# EAGLE board MainBoard (EAGLE 9.1.3)
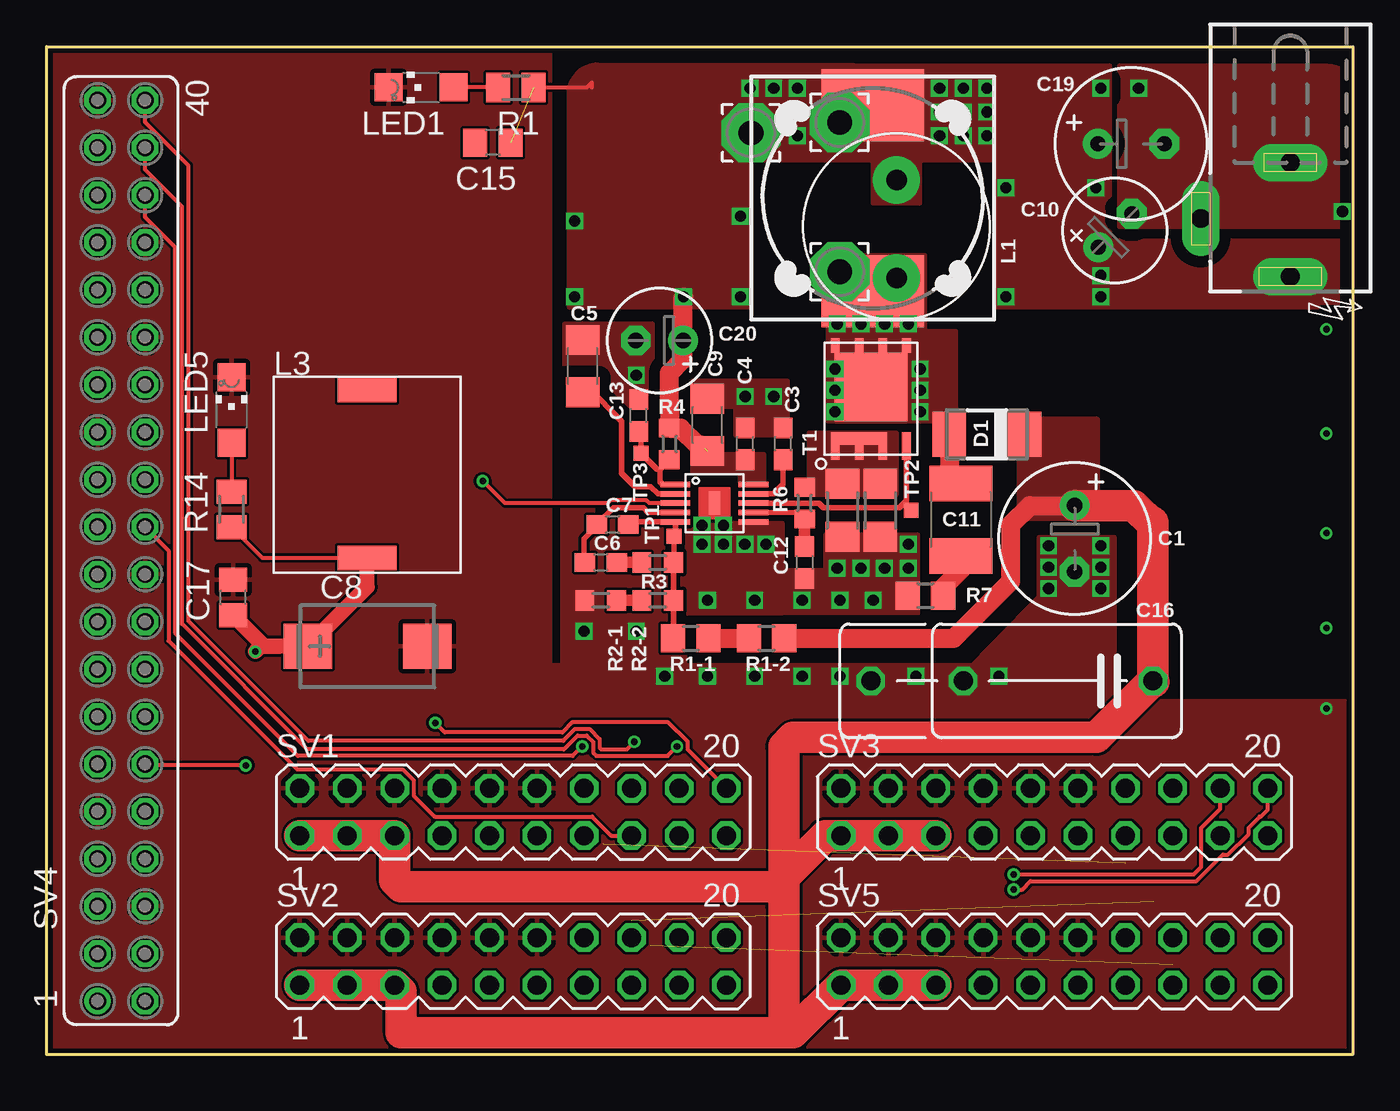
[diagram p0: board, top side]
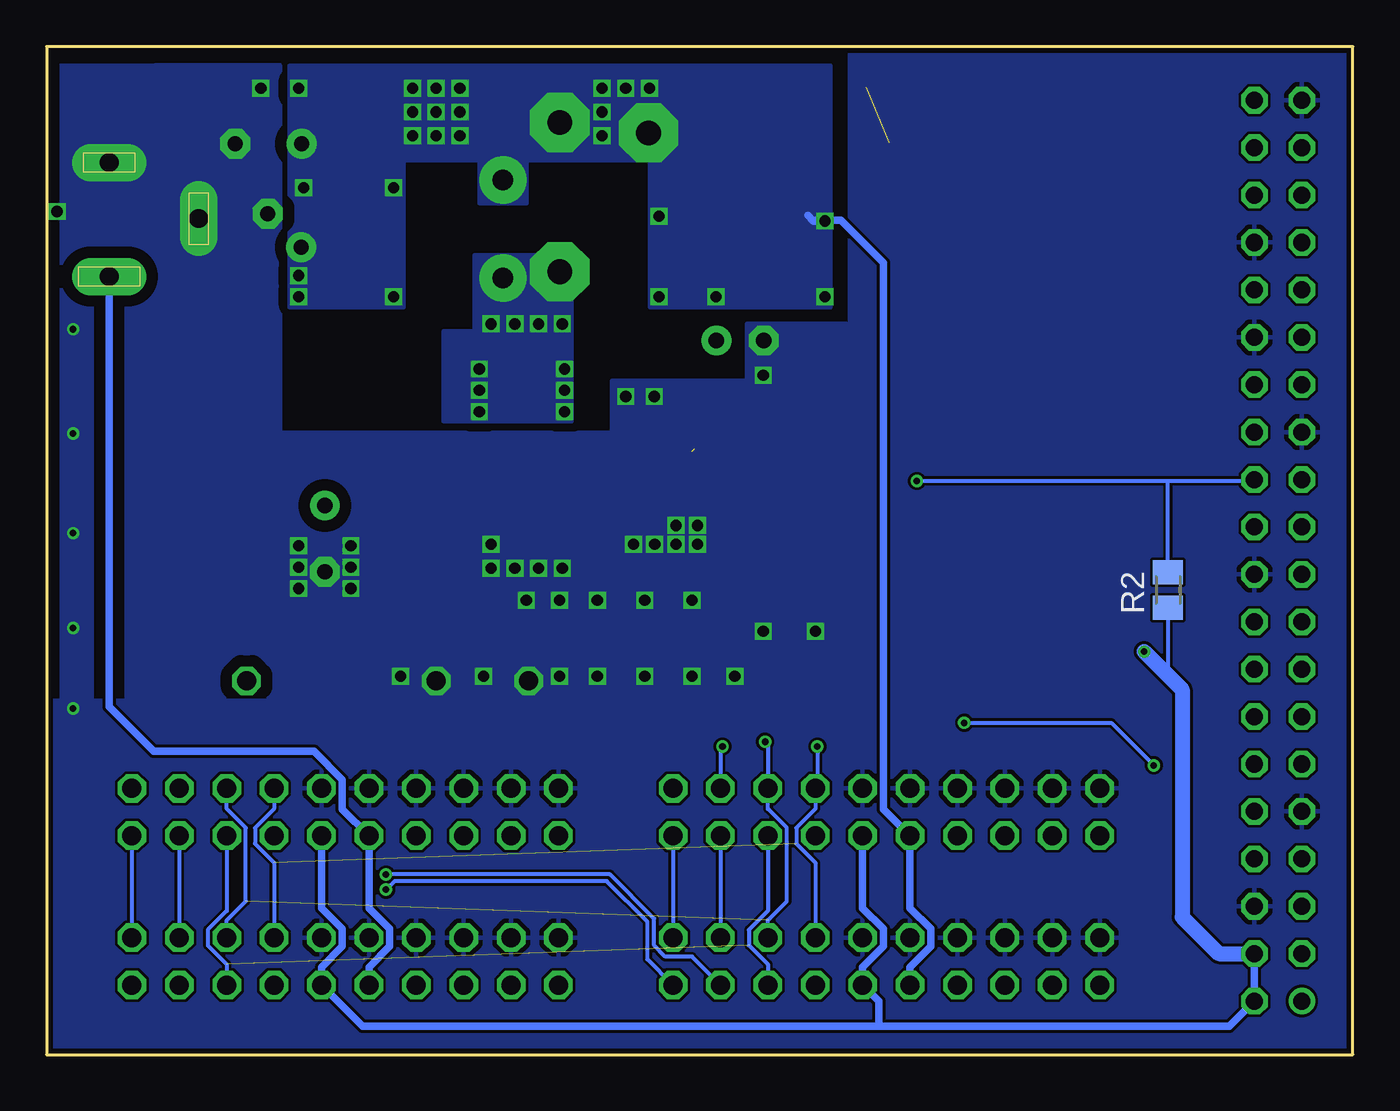
[diagram p1: board, bottom side, seen from below]

Size 70 x 54 mm. Coordinates in mm from the lower left corner, seen from the top.
Outline: 0,0 0,54 70,54 70,0 0,0
Copper layers (1*16): Top 0.035mm / dielectric 1.5mm / Bottom 0.035mm
Design rules "ITEADstudio_DRC": minimum track width 6mil, minimum drill 12mil, track to track 6mil, track to pad 6mil, pad to pad 6mil, via to via 6mil, smd to smd 0mil, copper to edge 10mil, drill to drill 10mil, minimum pad ring 10mil, minimum via ring 6mil, stop-mask expansion 2mil, vias tented up to drill 100mil, thermal gap 10mil

## Footprints (pad centres in the part's own frame; a part is rotated, then mirrored left to right if it is on the bottom)
E3,5-8 = drill 0.813 pad 1.6: + -1.778,0 | drill 0.813 pad 1.6 octagon: - 1.778,0
C0603 = smd 1.1 x 1: 1 -0.85,0; 2 0.85,0
C1206 = smd 1.6 x 1.8: 1 -1.4,0; 2 1.4,0
CT7343 = smd 2.6 x 2.4: + -3.2,0; - 3.2,0
E2,5-6 = drill 0.813 pad 1.6: + -1.27,0 | drill 0.813 pad 1.6 octagon: - 1.27,0
C1812 = smd 1.9 x 3.4: 1 -1.95,0; 2 1.95,0
C0805 = smd 1.3 x 1.5: 1 -0.95,0; 2 0.95,0
C102_152-062X184 = drill 1.016 octagon: 1 -5.08,0; 2 5.08,0; 3 10.033,0
DO-214AC = smd 1.8 x 2.4: A 2.025,0; C -2.025,0
MSOP10 = smd 0.3 x 1.6: P$1 -1,-2.1; P$2 -0.5,-2.1; P$3 0,-2.1; P$4 0.5,-2.1; P$5 1,-2.1; P$6 1,2.1; P$7 0.5,2.1; P$8 0,2.1; P$9 -0.5,2.1; P$10 -1,2.1 | smd 1.27 x 0.635: PWRPAD 0,0
DCJ0303 = drill 1 pad 2 long: 1 0,3.1; 2 4.8,0; 3 0,-3
DR125 = smd 3.85 x 5.5: 1 -4.975,0; 2 4.975,0
SRR1050A = smd 3.15 x 1.325: P$1 0,0; P$2 0,-9
CHIPLED_1206 = smd 1.5 x 1.5: A 0,-1.75; C 0,1.75
3,17/1,3 = drill 1.321 pad 3.175 octagon: 1 0,0
M0805 = smd 1.3 x 1.6: 1 -0.95,0; 2 0.95,0
R0805 = smd 1.3 x 1.5: 1 -0.95,0; 2 0.95,0
R0603 = smd 1 x 1.1: 1 -0.85,0; 2 0.85,0
R1206 = smd 1.6 x 1.803: 1 -1.422,0; 2 1.422,0
MA10-2 = drill 1.016 octagon: 1 -11.43,-1.27; 2 -11.43,1.27; 3 -8.89,-1.27; 4 -8.89,1.27; 5 -6.35,-1.27; 6 -6.35,1.27; 7 -3.81,-1.27; 8 -3.81,1.27; 9 -1.27,-1.27; 10 -1.27,1.27; 11 1.27,-1.27; 12 1.27,1.27; 13 3.81,-1.27; 14 3.81,1.27; 15 6.35,-1.27; 16 6.35,1.27; 17 8.89,-1.27; 18 8.89,1.27; 19 11.43,-1.27; 20 11.43,1.27
FE20-2 = drill 0.914: 1 -24.13,1.27 | drill 0.914 octagon: 2 -24.13,-1.27; 3 -21.59,1.27; 4 -21.59,-1.27; 5 -19.05,1.27; 6 -19.05,-1.27; 7 -16.51,1.27; 8 -16.51,-1.27; 9 -13.97,1.27; 10 -13.97,-1.27; 11 -11.43,1.27; 12 -11.43,-1.27; 13 -8.89,1.27; 14 -8.89,-1.27; 15 -6.35,1.27; 16 -6.35,-1.27; 17 -3.81,1.27; 18 -3.81,-1.27; 19 -1.27,1.27; 20 -1.27,-1.27; 21 1.27,1.27; 22 1.27,-1.27; 23 3.81,1.27; 24 3.81,-1.27; 25 6.35,1.27; 26 6.35,-1.27; 27 8.89,1.27; 28 8.89,-1.27; 29 11.43,1.27; 30 11.43,-1.27; 31 13.97,1.27; 32 13.97,-1.27; 33 16.51,1.27; 34 16.51,-1.27; 35 19.05,1.27; 36 19.05,-1.27; 37 21.59,1.27; 38 21.59,-1.27; 39 24.13,1.27; 40 24.13,-1.27
PQFN5X6 = smd 0.79 x 0.46: D1 2.22,-1.905; D2 2.22,-0.635; D3 2.22,0.635; D4 2.22,1.905 | smd 3.65 x 3.93: D5 0,0 | smd 1.45 x 0.46: G -3.16,-1.905; S1 -3.16,-0.635; S2 -3.16,0.635; S3 -3.16,1.905 | smd 0.66 x 3: S4 -2.765,0.635
TP08SQ = smd 0.8 x 0.8: TP 0,0
DSZ-10-R5 = drill 1.1 pad 2.54: P1 -2.75,0; P2 2.5,0

## Placement (x,y rotation side)
C1  4.7uF 250V  [E3,5-8]  55.09,27.64 270 top
C3  1uF  [C0603]  39.47,32.72 90 top
C4  100nF  [C0603]  37.44,32.72 90 top
C5  2.2uF  [C1206]  28.73,36.89 90 top
C6  150nF  [C0603]  29.69,26.37 0 top
C7  100pF  [C0603]  30.33,28.4 0 top
C8  100µF  [CT7343]  17.19,21.88 0 top
C9  10uF  [C1206]  35.41,33.74 90 top
C10  100uF  [E2,5-6]  57.25,44.15 45 top
C11  100pF 250V  [C1812]  49,28.66 270 top
C12  330pF  [C0603]  40.61,26.37 270 top
C13  470pF  [C0603]  31.72,34.24 90 top
C15  100nF  [C0805]  23.91,48.86 180 top
C16  100nF 250V X2  [C102_152-062X184]  54.2,20.02 180 top
C17  100nF  [C0805]  10,24.5 90 top
C19  100uF  [E3,5-8]  58.12,48.8 0 top
C20  100uF  [E2,5-6]  32.84,38.26 180 top
D1  ES2G  [DO-214AC]  50.39,33.23 180 top
IC1  TPS40210DGQ  [MSOP10]  35.79,29.55 270 top
J1  [DCJ0303]  66.65,44.79 180 top
L1  47uH  [DR125]  44.27,45.88 90 top
L3  22µH  [SRR1050A]  17.18,35.61 0 top
LED1  [CHIPLED_1206]  20.07,51.82 90 top
LED5  [CHIPLED_1206]  9.91,34.54 0 top
LP1  [3,17/1,3]  42.49,49.94 0 top
LP2  [3,17/1,3]  42.49,41.94 0 top
LP3  [3,17/1,3]  37.74,49.38 0 top
R1  5.6k  [M0805]  25.15,51.82 180 top
R1-1  150k  [R0805]  34.52,22.31 0 top
R1-2  150k  [R0805]  38.58,22.31 0 top
R2  5.6k  [M0805]  9.91,24.89 90 bottom
R2-1  1k  [R0603]  29.69,24.34 0 top
R2-2  150R  [R0603]  32.74,24.34 0 top
R3  240k  [R0603]  32.74,26.37 180 top
R4  620k  [R0603]  33.38,32.72 90 top
R5-1  0R100  [R1206]  42.65,29.16 90 top
R5-2  0R100  [R1206]  44.68,29.16 90 top
R6  1k  [R0603]  40.61,29.55 90 top
R7  3R3  [R0805]  47.09,24.59 0 top
R14  1.5k  [M0805]  9.91,29.21 90 top
SV1  [MA10-2]  25,13 0 top
SV2  [MA10-2]  25,5 0 top
SV3  [MA10-2]  54,13 0 top
SV4  [FE20-2]  4,27 90 top
SV5  [MA10-2]  54,5 0 top
T1  IRFH5025PBF  [PQFN5X6]  44.17,35.77 90 top
TP1  TPTP08SQ  [TP08SQ]  33.63,27.77 0 top
TP2  TPTP08SQ  [TP08SQ]  46.33,29.16 0 top
TP3  TPTP08SQ  [TP08SQ]  31.85,32.21 0 top
U$2  FERYSTER-DSZ-10-R5  [DSZ-10-R5]  45.54,44.35 90 top
U$5  [DANGER-SIGN-1X]  70.59,39.2 90 top

## Library data of the parts
C1 C3-C7 C9-C13 C19 C20 R1-1 R1-2 R2-1 R2-2 R3 R4 R5-1 R5-2 R6 R7 = rcl
C8 = rcl; MOUSER: 581-NOSD107M006; SPICEPREFIX: C
C15 C17 = rcl; MOUSER: 710-885012207072; SPICEPREFIX: C
C16 U$2 U$5 = jwr
D1 = diode
IC1 = TI-power
J1 = con-jack; OC_FARNELL: unknown; OC_NEWARK: unknown
L1 = inductors
L3 = lichtenstein_onion; MOUSER: 652-SRR1050A-220Y
LED1 LED5 = led; MOUSER: 604-APTR3216SGC
LP1-LP3 = wirepad
R1 R2 = rcl; MOUSER: 652-CR0805FX-5601ELF; SPICEPREFIX: R
R14 = rcl; MOUSER: 652-CR0805FX-1501ELF; SPICEPREFIX: R
SV1-SV3 SV5 = con-lstb; OC_FARNELL: unknown; OC_NEWARK: unknown
SV4 = con-lsta; OC_FARNELL: unknown; OC_NEWARK: unknown
T1 = IRFH5025
TP1-TP3 = testpad

## Nets
!HV_EN: IC1.P$3 R2.2 SV4.24
!K_BLANK: SV1.14 SV2.14 SV3.14 SV4.36 SV5.14
!K_LATCH: SV1.15 SV2.15 SV3.15 SV4.22 SV5.15
+5V: C8.+ C17.1 L3.P$2 R2.1 R14.1 SV1.11 SV2.11 SV3.11 SV4.2 SV4.4 SV5.11
+12V: C4.1 C9.1 C10.+ C15.1 C19.+ C20.+ IC1.P$10 J1.1 L1.2 LP1.1 LP3.1 R1.1 R4.2 SV1.9 SV2.9 SV3.9 SV5.9 U$2.P2
COMP: C6.1 C7.1 IC1.P$4
D: R5-1.2 R5-2.2 R6.2 T1.S1 T1.S2 T1.S3 T1.S4
FB: C7.2 IC1.P$5 R1-1.1 R2-2.2 R3.1 TP1.TP
GDRV: IC1.P$8 T1.G TP2.TP
GND: C1.- C3.2 C4.2 C5.2 C8.- C9.2 C10.- C12.2 C13.2 C16.2 C16.3 C17.2 C19.- C20.- IC1.P$6 IC1.PWRPAD J1.2 J1.3 LED1.C LED5.C R2-1.1 R5-1.1 R5-2.1 R7.1 SV1.2 SV1.4 SV1.6 SV1.8 SV1.10 SV1.12 SV2.2 SV2.4 SV2.6 SV2.8 SV2.10 SV2.12 SV3.2 SV3.4 SV3.6 SV3.8 SV3.10 SV3.12 SV4.6 SV4.9 SV4.20 SV4.25 SV4.30 SV4.34 SV4.39 SV5.2 SV5.4 SV5.6 SV5.8 SV5.10 SV5.12
HV: C1.+ C16.1 D1.C R1-2.2 SV1.1 SV1.3 SV1.5 SV2.1 SV2.3 SV2.5 SV3.1 SV3.3 SV3.5 SV5.1 SV5.3 SV5.5
I2C_SCL: SV4.5
I2C_SDA: SV4.3
K_CLK: SV1.16 SV2.16 SV3.16 SV4.40 SV5.16
K_DIN: SV1.18 SV4.38
K_DOUT1: SV1.17 SV2.18
K_DOUT2: SV2.17 SV3.18
K_DOUT3: SV3.17 SV5.18
K_DOUT4: SV5.17
LED_DIN: SV1.20 SV4.12
LED_DOUT1: SV1.19 SV2.20
LED_DOUT2: SV2.19 SV3.20
LED_DOUT3: SV3.19 SV5.20
LED_DOUT4: SV5.19
N$1: LED5.A R14.2
N$2: LED1.A R1.2
N$4: R1-1.2 R1-2.1
N$7: C13.1 IC1.P$1 R4.1 TP3.TP
N$8: C3.1 IC1.P$9
N$9: C6.2 R3.2
N$12: R2-1.2 R2-2.1
N$13: C5.1 IC1.P$2
N$15: C11.2 R7.2
PULSE: C11.1 D1.A L1.1 LP2.1 T1.D1 T1.D2 T1.D3 T1.D4 T1.D5 U$2.P1
SNS: C12.1 IC1.P$7 R6.1

## Tracks (layer width: path | path; a pad name or v marks a point on that pad's centre or on a via)
!HV_EN  (via drill 0.35)
  Top 0.203: v23.37,30.73 24.56,29.55 30.05,29.55 30.21,29.7 32.15,29.7 32.3,29.55 IC1.P$3
  Bottom 0.203: v23.37,30.73 9.91,30.73 | 9.91,30.73 5.35,30.73 SV4.24 | R2.2 9.91,30.73
!K_BLANK  (via drill 0.35)  (1 unrouted)
  Top 0.203: v28.7,16.51 28.19,16 13.46,16 6.9,22.57 | SV4.36 5.27,44.88 6.9,43.25 6.9,22.86 | 6.9,22.57 6.9,22.86 | 6.9,22.57 6.9,22.86
  Bottom 0.203: SV3.14 57.81,13.17 58.83,12.15 58.83,11.31 57.81,10.29 SV5.14 | SV1.14 28.81,13.97 | 28.81,13.97 28.81,13.17 29.83,12.15 29.83,11.31 28.81,10.29 SV2.14 | v28.7,16.51 28.7,14.08 28.81,13.97
!K_LATCH  (1 unrouted)
  Top 0.203: SV1.15 30.25,11.73 29.23,12.75 20.79,12.75 19.67,13.87 19.67,14.69 19.07,15.29 13.43,15.29 6.54,22.17 6.54,27 SV4.22
  Bottom 0.203: SV3.15 60.35,7.71 61.37,6.69 61.37,5.85 60.35,4.83 SV5.15 | SV1.15 31.35,7.71 32.37,6.69 32.37,5.85 31.35,4.83 SV2.15
+5V  (via drill 0.35)
  Top 0.203: R14.1 11.56,26.61 L3.P$2
  Top 0.813: L3.P$2 17.18,25.06 C8.+ 12.45,21.88 | 12.45,21.88 11.46,21.88 v11.18,21.59 | C17.1 11.67,21.88 12.45,21.88
  Bottom 0.203: R2.1 9.91,20.83 10.16,20.57
  Bottom 0.406: 25.15,1.52 6.62,1.52 SV4.2 SV4.4 | 25.15,1.52 25.4,1.52 25.4,2.86 SV2.11 26.27,4.69 25.15,5.81 25.15,6.73 26.27,7.85 SV1.11 | 25.15,1.52 53.06,1.52 SV5.11 55.27,4.69 54.15,5.81 54.15,6.73 55.27,7.85 SV3.11
  Bottom 0.813: v11.18,21.59 10.16,20.57 9.14,19.56 9.14,7.37 7.19,5.41 SV4.4
+12V  (via drill 0.6)  (2 unrouted)
  Top 0.203: R1.1 28.96,51.82 29.21,52.07 29.21,51.82
  Top 1.016: 35.28,32.59 35.28,32.46 35.07,32.67 34.87,32.67 33.97,33.57 R4.2 33.38,34.5 33.38,36.28 33.38,36.51 34.11,37.24 C20.+ 34.11,40.57 v34.14,40.59
  Bottom 0.406: SV2.9 23.73,4.69 22.61,5.81 22.61,6.73 23.73,7.85 SV1.9 25.15,13.15 25.15,42.42 27.43,44.7 28.96,44.7 29.21,44.96 28.91,44.66 v28.3,44.66 | SV5.9 52.73,4.69 51.61,5.81 51.61,6.73 52.73,7.85 SV3.9 54.15,13.15 54.15,14.73 55.67,16.26 64.26,16.26 66.65,18.64 J1.1
  other vias: 50.39,50.5 50.39,51.77 38.96,51.77 40.23,50.5 40.23,51.77 40.23,49.23 56.49,41.74 56.49,40.59 47.85,51.77 47.85,50.5 47.85,49.23 37.69,51.77 49.12,49.23 50.39,49.23 49.12,50.5 49.12,51.77 28.3,40.59 37.19,40.59 37.19,44.91 51.41,40.59 51.41,46.44 56.49,51.77 56.24,46.44
  pour Top (isolate 0.61, no thermals): 51.38,40.04 68.15,40.04 68.15,43.59 51.38,43.59
  pour Top (isolate 0.61, no thermals): 62.31,43.59 62.31,40.29 70.18,40.29 70.18,40.29 70.18,43.59
  pour Bottom (no thermals): 44.27,51.21 44.27,45.62 46.81,45.62 46.81,51.21
  pour Top (no thermals): 44.27,51.21 44.27,45.62 46.81,45.62 46.81,51.21
  pour Top (isolate 0.61, no thermals): 28,40.04 28,51.5 arc-90 29.54,53.04 56.97,52.99 56.97,40.04 50.88,40.04 50.88,47.91 37.67,47.91 37.67,40.04
  pour Bottom (isolate 0.61, no thermals): 28,52.99 56.97,52.99 56.97,40.04 50.88,40.04 50.88,47.91 37.67,47.91 37.67,40.04 28,40.04
  pour Top (no thermals): 38.43,30.64 38.43,32.16 34.62,32.16 34.62,31.15 37.16,31.15 37.16,30.64
  pour Top (no thermals): 42.75,51.21 45.54,51.21 45.54,48.67 42.75,48.67
COMP
  Top 0.254: 28.93,26.37 C6.1
  Top 0.305: IC1.P$4 32.23,29.04 31.98,29.29 30.38,29.29 C7.1 29.49,28.3 28.8,27.64 28.8,26.5 28.93,26.37
D
  pour Top (no thermals): 40.84,30 40.84,33.3 45.54,33.3 45.54,30
FB
  Top 0.305: R1-1.1 33.6,22.33 R2-2.2 R3.1 33.63,26.4 TP1.TP 33.71,27.82 IC1.P$5 31.32,28.55 C7.2
GDRV
  Top 0.305: IC1.P$8 41.38,29.55 41.63,29.29 45.69,29.29 45.91,29.51 | 45.91,29.51 46.08,29.67 46.08,30.43 T1.G | TP2.TP 46.25,29.16 45.91,29.51
GND  (via drill 0.35, 0.6)
  other vias: 42.37,26.07 43.64,26.07 46.18,26.07 42.52,24.34 37.44,35.26 38.96,35.26 44.3,24.34 56.49,27.26 53.7,24.97 53.7,27.26 53.7,26.12 35.13,28.35 35.13,27.34 37.41,27.34 36.27,28.35 36.27,27.34 38.56,27.34 44.91,26.07 28.8,22.69 31.6,22.69 31.6,36.4 42.52,20.27 35.41,24.34 37.95,24.34 40.49,24.34 35.41,20.27 37.95,20.27 40.49,20.27 46.58,20.27 51.03,20.27 33.12,20.27 56.49,26.12 56.49,24.97 46.18,27.34 58.52,51.77 69.44,45.17 68.58,38.86 68.58,18.54 68.58,27.94 68.58,33.27 68.58,22.86
  pour Top (isolate 0.203, no thermals): 32.59,30.64 36.65,30.64 36.65,28.48 39.45,28.48 39.45,23.65 32.59,23.65
  pour Top (no thermals): 37.19,23.68 46.69,23.65 46.69,27.84 41.73,27.84 41.73,25.94 37.16,25.94
  pour Top (no thermals): 39.7,33.18 39.7,36.1 34.62,36.1 34.62,34.7 36.91,34.7 36.91,33.18
  pour Top (no thermals): 27.64,29.62 29.29,29.62 29.29,28.61 34.11,28.61 34.24,19.08 27.64,19.08
  pour Bottom (isolate 0.61, no thermals): 27.13,19.11 27.13,39.15 32.46,39.15 32.46,36.1 39.7,36.1 39.7,33.3 57.48,33.3 57.48,52.99 70,52.99 70,15.14 64.34,15.14 64.34,19.08
  pour Top (isolate 0.61, no thermals): 27.76,34.7 32.46,34.7 32.46,39.15 27.76,39.15
  pour Top (no thermals): 49.61,20.86 54.43,25.81 57.23,25.81 57.23,19.08 43.38,19.08 43.38,20.86
  pour Top (isolate 0.508, no thermals): 53.54,20.86 27.13,20.86 27.13,19.08 53.54,19.08
  pour Top (no thermals): 53.16,24.16 53.16,27.72 57.23,27.72 57.23,24.16
  pour Bottom (isolate 0.61, no thermals): 57.51,53.04 70.94,52.99 70.94,31.4 57.48,31.4
  pour Top (isolate 0.61, no thermals): 57.48,44.35 57.48,52.99 68.4,52.99 arc-90 70.94,50.45 70.94,44.35
  pour Bottom: 0,0 0,54 27,54 27,19 70,19 70,0
  pour Top: 0,0 0,54 27,54 27,19 70,19 70,0
HV
  Top 1.016: R1-2.2 48.62,22.31 51.66,25.36 51.66,28.4 52.68,29.42 C1.+
  Top 1.676: 59.28,28.4 59.28,27.77 59.28,27.13 59.28,20.78 C16.1 | 59.28,28.4 58.27,29.42 C1.+ | 59.33,19.97 C16.1 | 59.28,28.4 59.28,28.53 | SV3.5 SV3.3 SV3.1 41.73,11.73 39.5,9.5 | 39.5,9.5 39,9 19,9 18.65,9.35 SV1.5 SV1.1 SV1.3 | 40.01,1.17 SV5.1 SV5.5 SV5.3 | 40.01,1.17 19,1.17 19,3.38 SV2.5 | SV2.5 SV2.1 | 39.5,9.5 39.5,8 | 39.5,8 39.5,1.68 40.01,1.17 | C16.1 56.26,17 40,17 39.5,16.5 39.5,8 | SV2.3 SV2.5
  pour Top (isolate 0.61, no thermals): 52.18,33.99 56.24,33.99 56.24,28.78 52.18,28.78
K_CLK  (via drill 0.35)  (1 unrouted)
  Top 0.203: v31.5,16.76 31.09,16.36 29.72,16.36 29.64,16.44 29.64,16.9 29.09,17.45 28.31,17.45 27.68,16.81 14.02,16.81 7.61,23.22 7.61,47.62 5.27,49.95 SV4.40
  Bottom 0.203: SV5.16 60.35,7.2 59.33,8.22 59.33,12.15 60.35,13.17 SV3.16 | SV2.16 31.35,7.2 30.33,8.22 30.33,12.15 31.35,13.17 31.35,14.22 | 31.35,14.22 SV1.16 | v31.5,16.76 31.35,16.62 31.35,14.22
K_DIN  (via drill 0.35)
  Top 0.203: v33.78,16.51 33.27,16 29.46,16 29.28,16.18 29.28,16.75 28.94,17.09 28.46,17.09 27.73,16.36 13.97,16.36 7.25,23.08 7.25,45.43 5.27,47.41 SV4.38
  Bottom 0.203: v33.78,16.51 33.89,16.4 SV1.18
K_DOUT1
  Bottom 0.203: SV1.17 SV2.18
K_DOUT2  (via drill 0.35)
  Top 0.203: v51.82,9.65 61.47,9.65 61.87,10.06 61.87,12.15 62.89,13.17 SV3.18
  Bottom 0.203: v51.82,9.65 39.81,9.65 37.45,7.29 37.45,5.85 36.85,5.25 35.41,5.25 SV2.17
K_DOUT3
  Bottom 0.203: SV3.17 SV5.18
LED_DIN  (via drill 0.35)
  Top 0.203: SV1.20 34.36,16.34 34.36,16.75 33.31,17.8 28.17,17.8 27.64,17.27 21.34,17.27 v20.83,17.78 | v10.67,15.49 5.35,15.49 SV4.12
  Bottom 0.203: v20.83,17.78 12.95,17.78 v10.67,15.49
LED_DOUT1
  Bottom 0.203: SV1.19 SV2.20
LED_DOUT2  (via drill 0.35)
  Top 0.203: v51.82,8.85 52.28,8.85 52.73,9.3 61.62,9.3 63.03,10.71 63.31,10.71 64.41,11.82 64.41,12.15 65.01,12.75 65.06,12.75 65.43,13.11 SV3.20
  Bottom 0.203: SV2.19 37.8,5.1 37.8,7.11 39.99,9.3 51.35,9.3 51.58,9.07 51.59,9.07 v51.82,8.85
LED_DOUT3
  Bottom 0.203: SV3.19 SV5.20
N$1
  Top 0.203: LED5.A R14.2
N$2
  Top 0.203: R1.2 LED1.A
N$4
  Top 1.016: R1-1.2 R1-2.1
N$7
  Top 0.305: IC1.P$1 33.02,30.54 32.87,30.69 32.87,31.35 | 32.87,31.35 R4.1 | 32.87,31.35 32.72,31.35 TP3.TP 31.85,33.14 C13.1
N$8
  Top 0.305: IC1.P$9 38.96,30.05 39.47,30.56 C3.1
N$9
  Top 0.61: R3.2 C6.2
N$12
  Top 0.61: R2-2.1 R2-1.2
N$13
  Top 0.305: IC1.P$2 32.77,30.05 32.36,30.43 31.52,30.43 30.81,31.15 30.81,33.69 30.81,33.94 30.3,34.45 29.54,35.21 29,35.21 C5.1
N$15
  Top 1.016: R7.2 47.95,24.92 49,25.99 C11.2
PULSE  (via drill 0.6)
  Top 1.016: D1.A 48.39,31.22 C11.1
  other vias: 42.24,36.73 42.24,34.45 46.81,36.73 42.37,39.15 46.81,34.45 46.81,35.59 43.64,39.15 44.91,39.15 46.18,39.15 42.24,35.59
  pour Bottom (no thermals): 41.86,33.94 41.86,42.83 47.07,42.83 47.07,33.94
  pour Top (no thermals): 41.86,33.94 41.86,42.83 47.07,42.83 47.07,33.94
  pour Bottom (no thermals): 46.81,33.94 48.72,33.94 48.72,38.77 46.81,38.77
  pour Top (no thermals): 46.81,33.94 48.72,33.94 48.72,38.77 46.81,38.77
SNS
  Top 0.305: IC1.P$7 40.77,29.04 R6.1
  Top 0.61: R6.1 C12.1